# Altium PCB WorkplaceSaferyDevice_PCB.PcbDoc
Units mm, origin at the board's own origin, x right, y up, seen from the top; angles counter-clockwise.
Board outline 40 x 50 mm, 4 copper layers (Top Layer, Int1 (GND), Int2 (GND), Bottom Layer), stack 1.429 mm thick; 52 components, 37 nets, 203 pads, 180 vias.
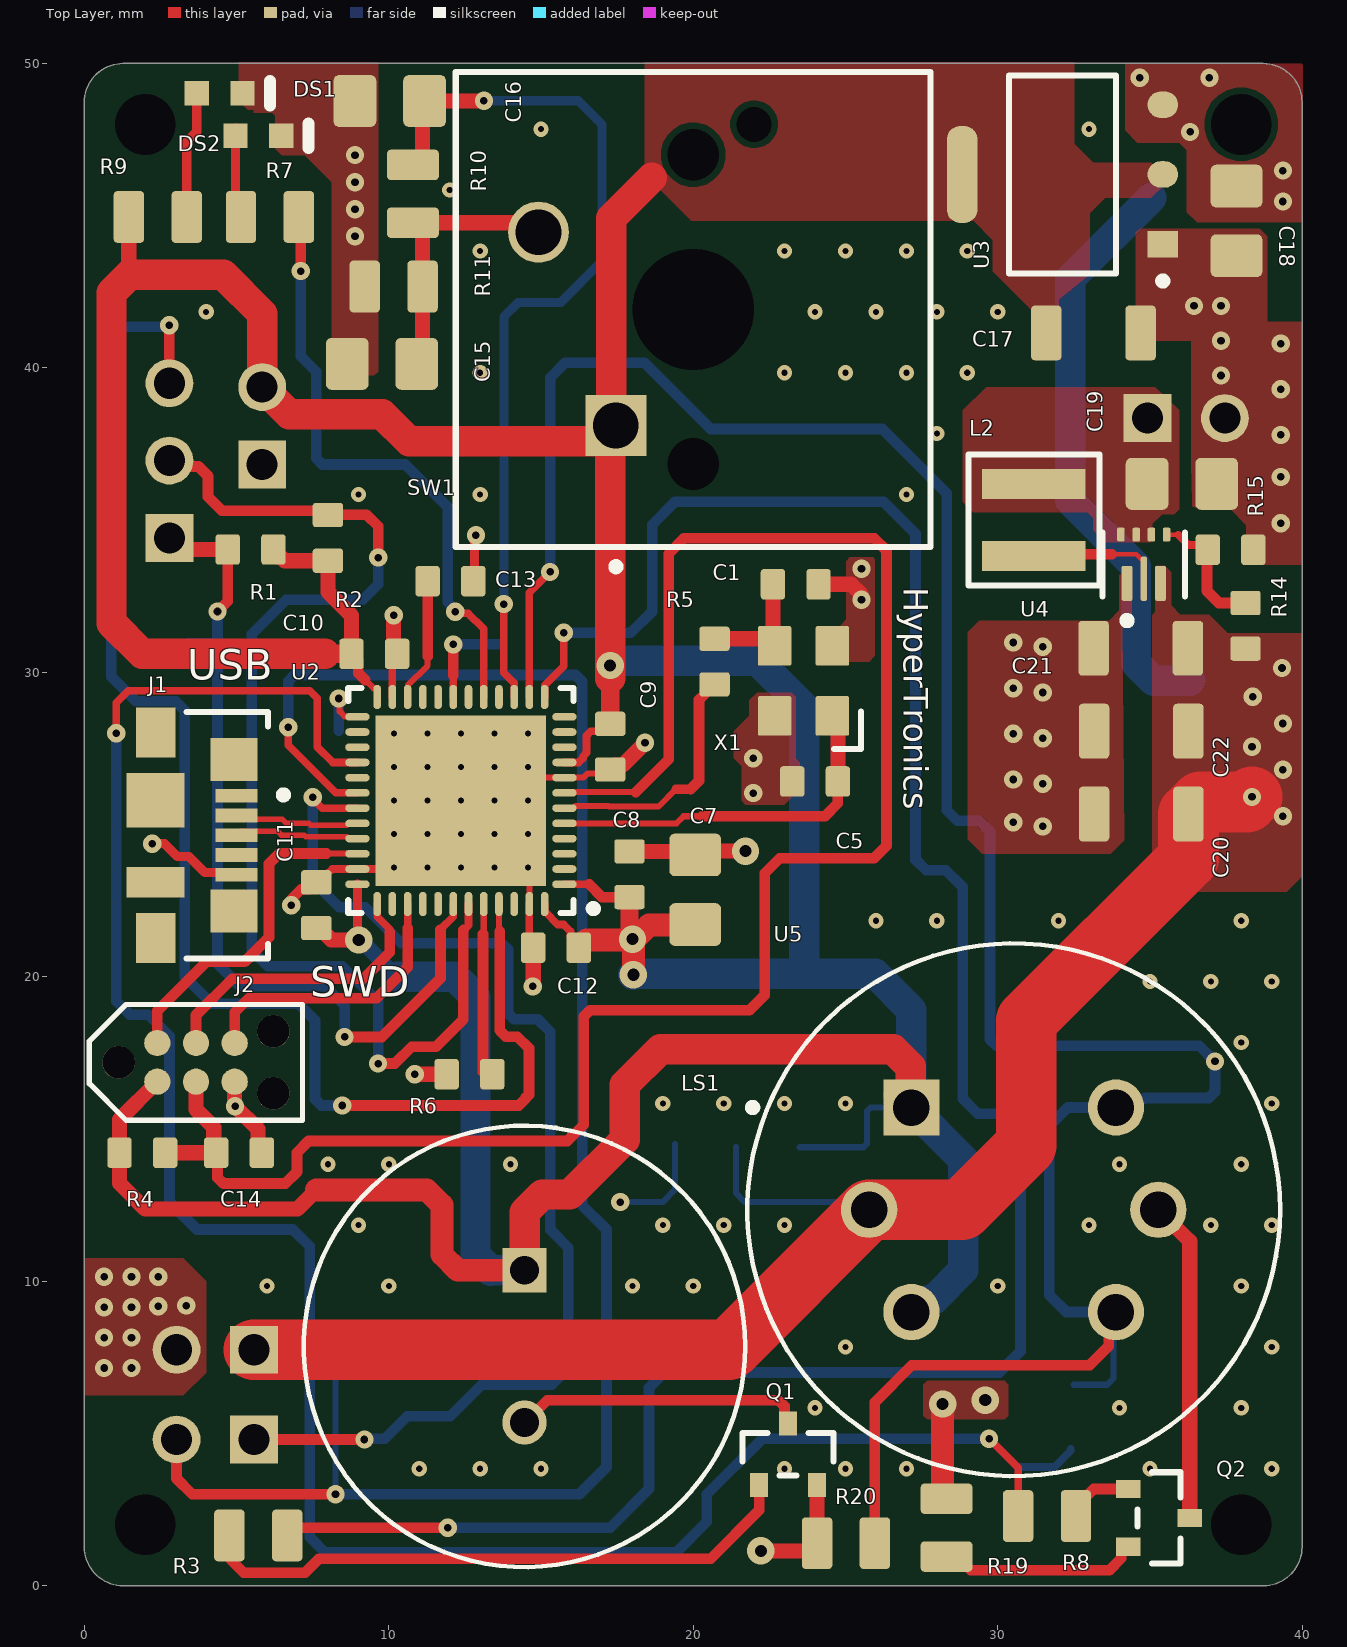
[diagram p0: Top Layer view]
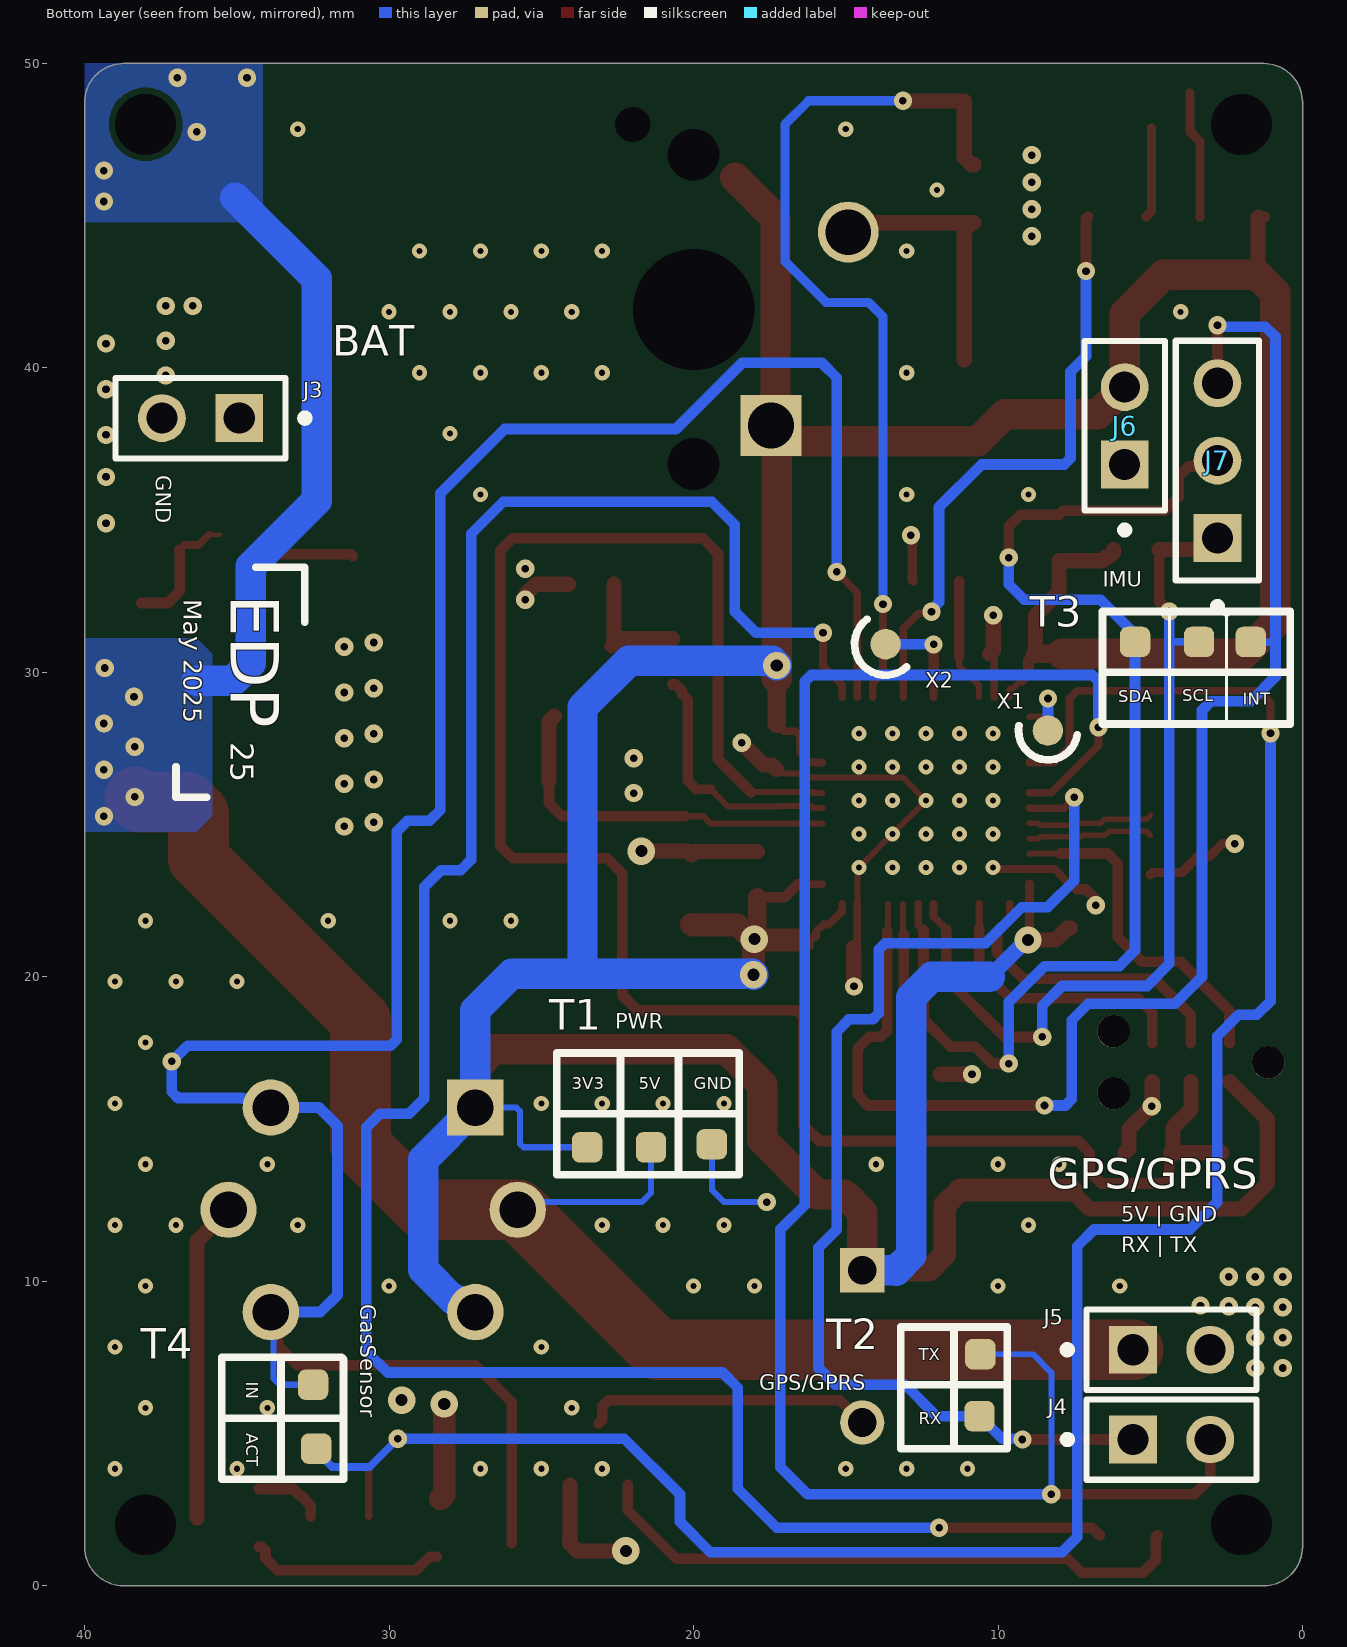
[diagram p1: Bottom Layer view, seen from below]
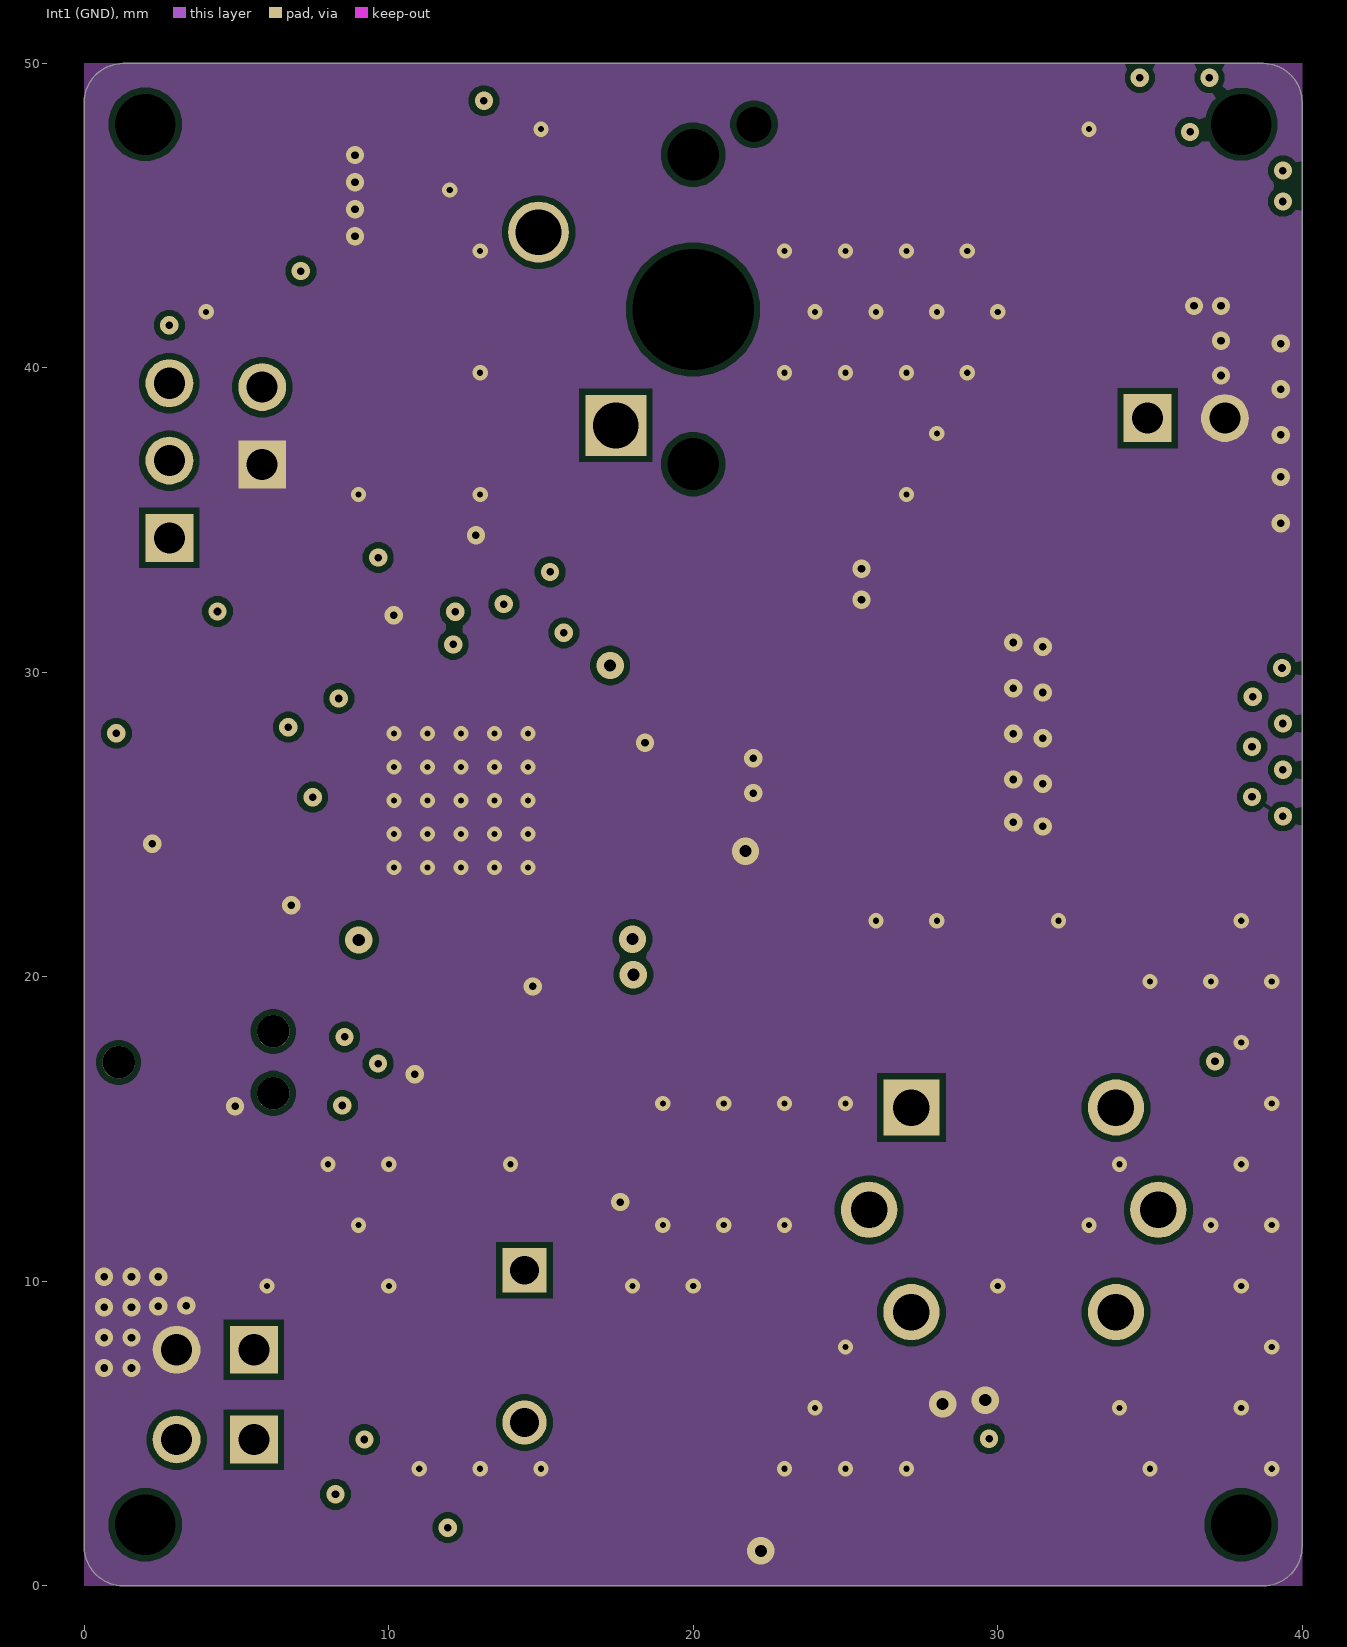
[diagram p2: Int1 (GND)]
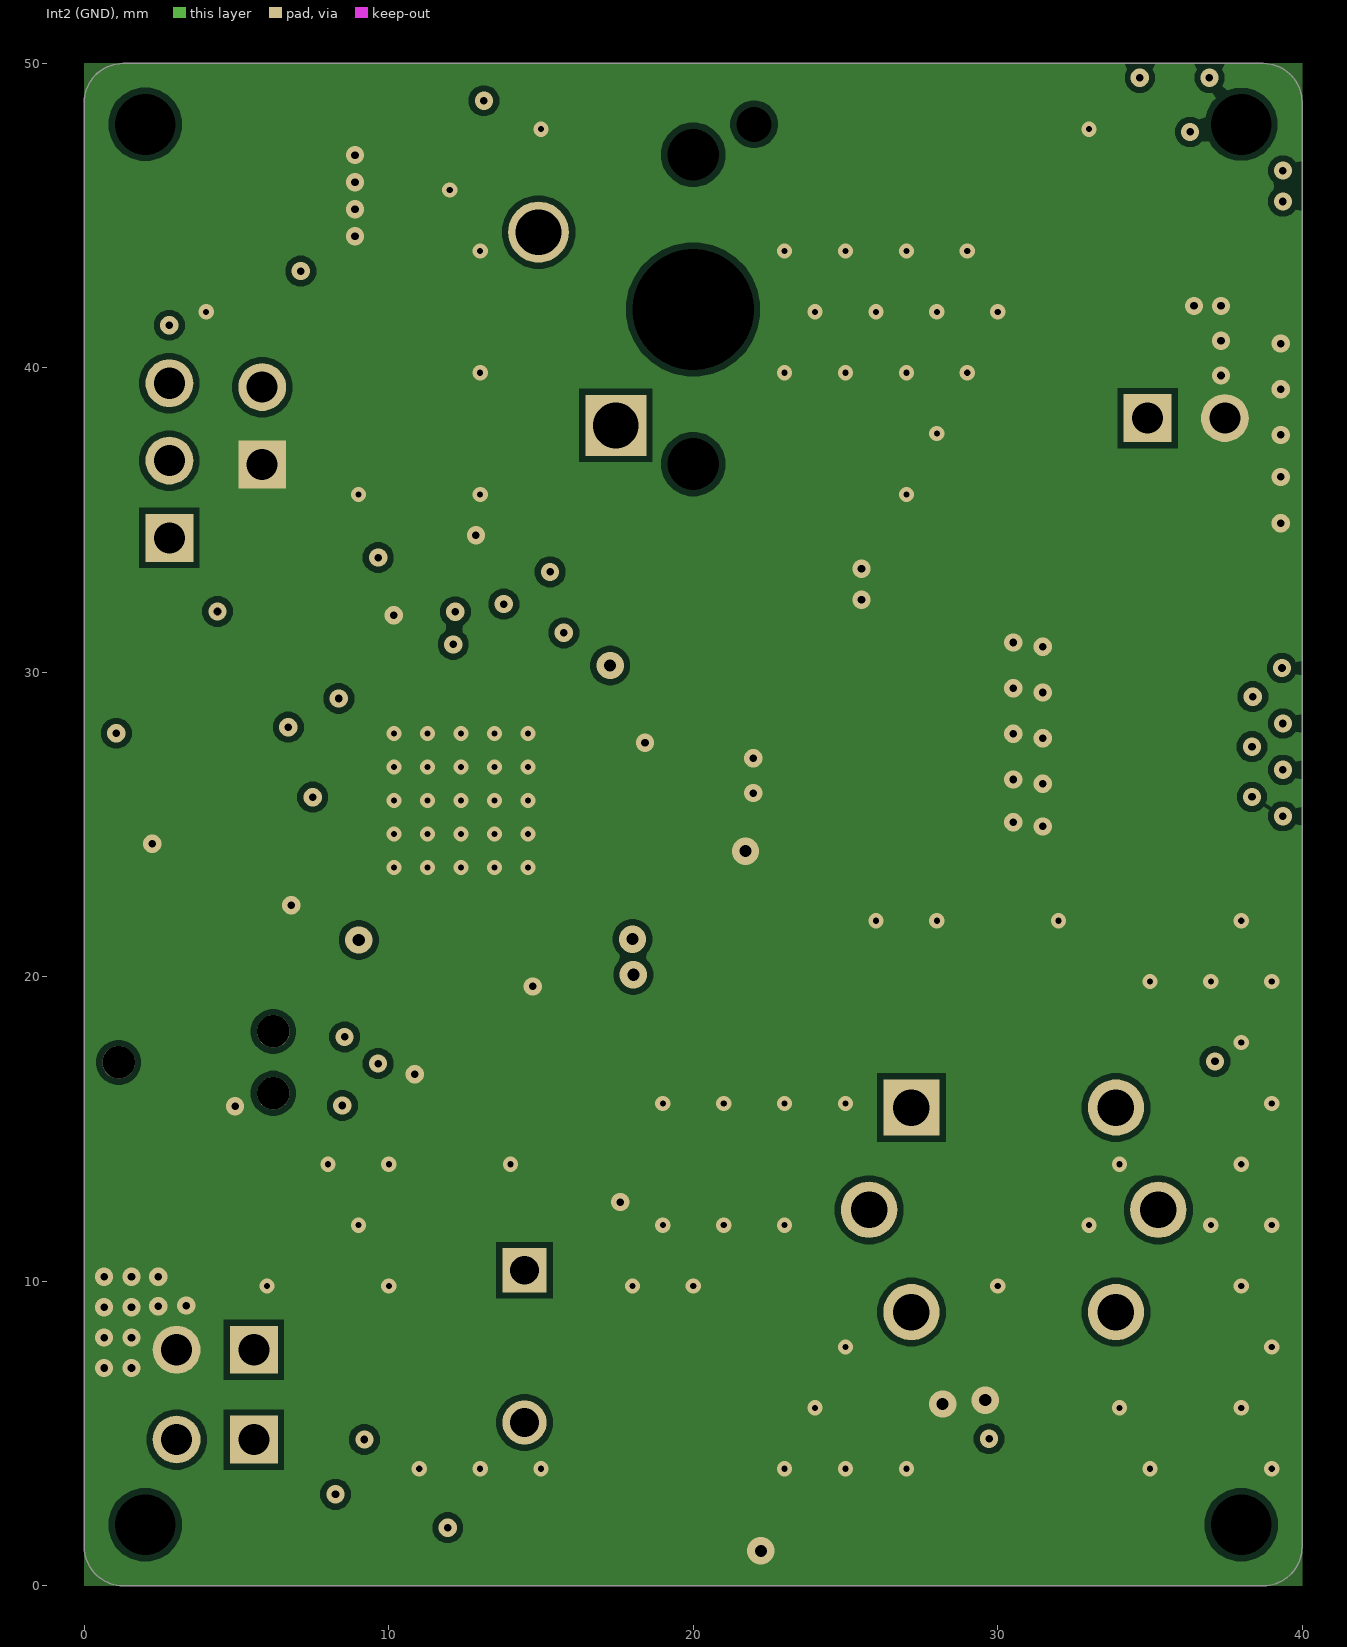
[diagram p3: Int2 (GND)]
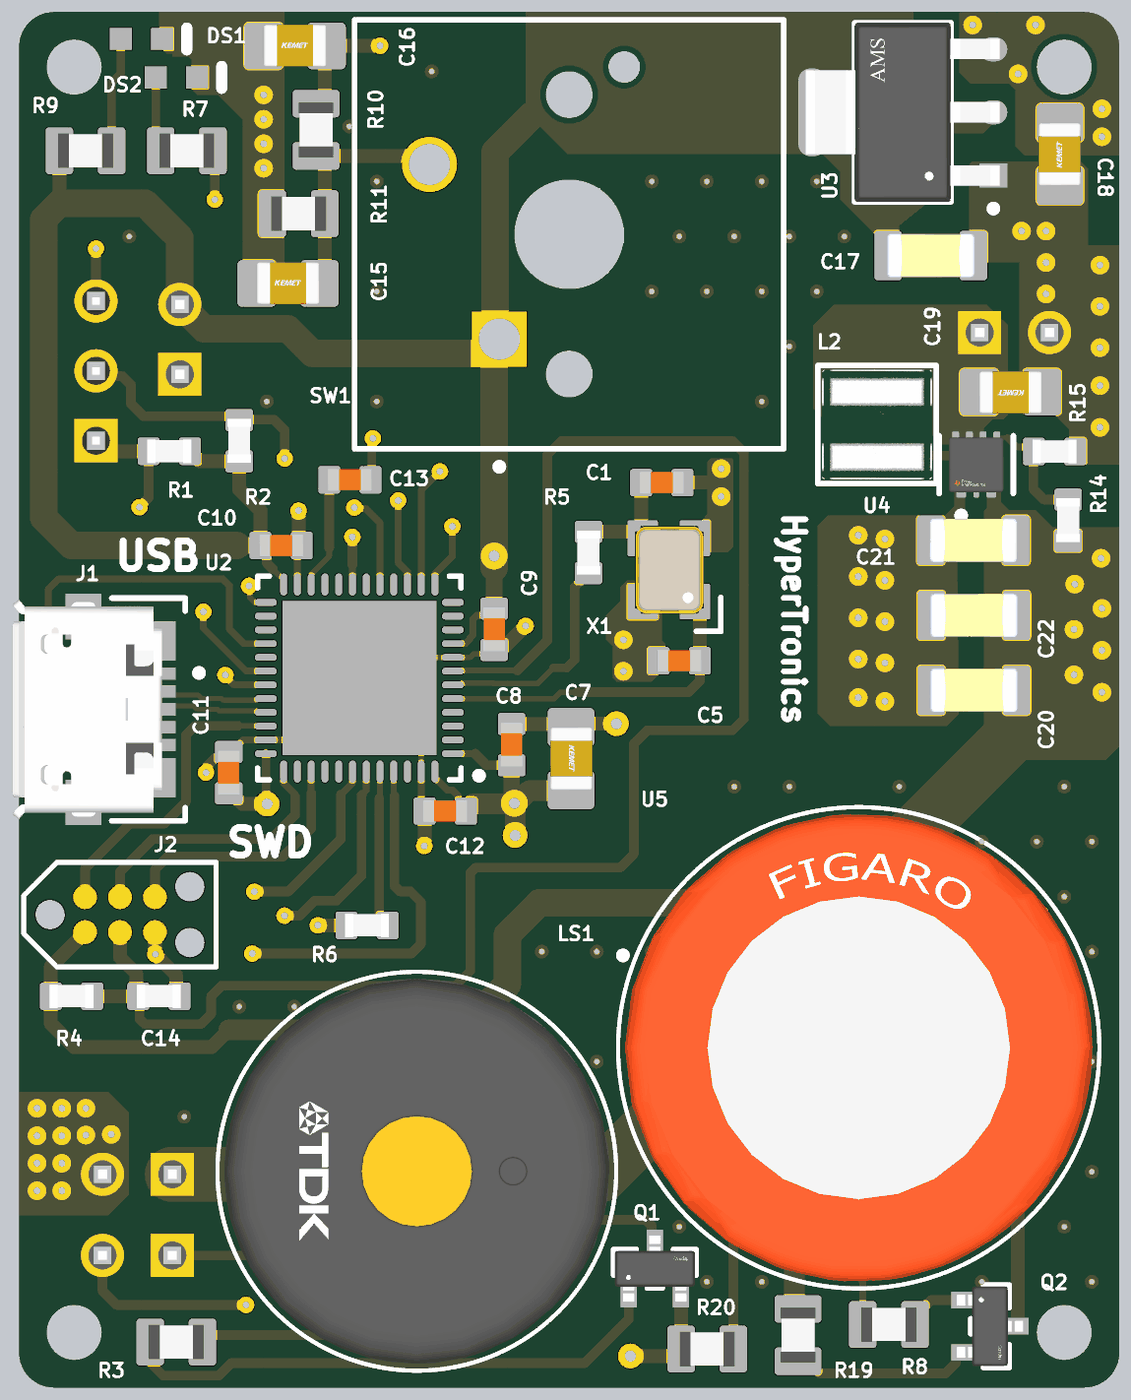
[diagram p4: 3D render of the assembled board from above, using the file's embedded part models]
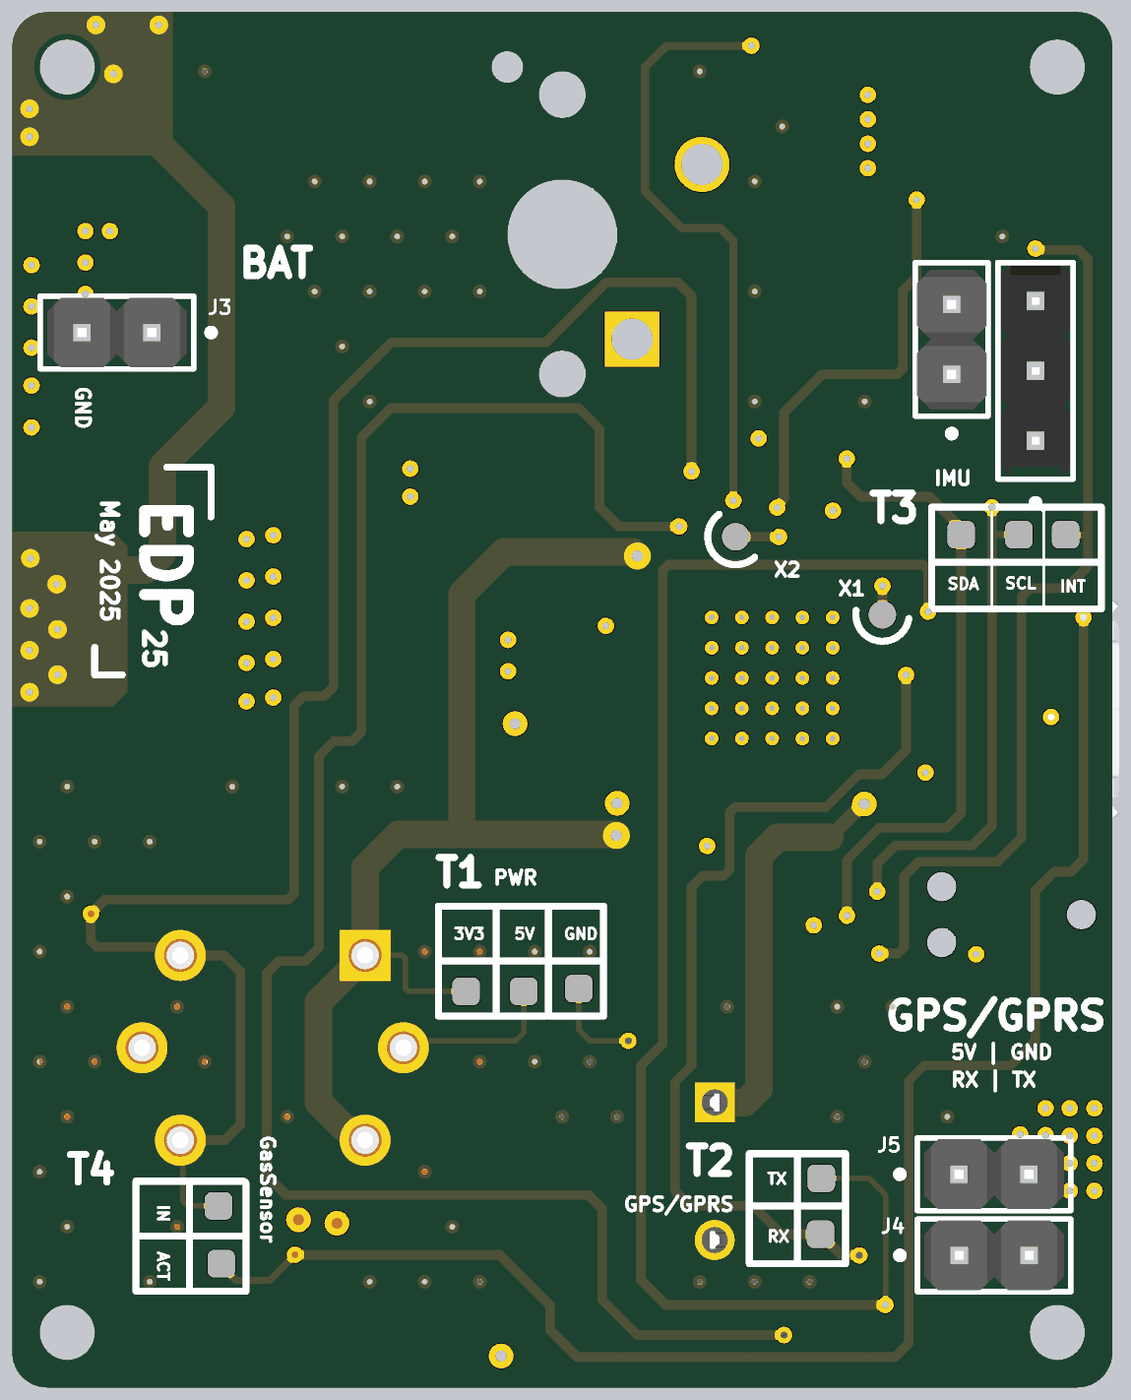
[diagram p5: 3D render of the assembled board from below, using the file's embedded part models]

## Layer stack, top to bottom
Top Solder: solder mask 0.0254, SM-001, Dk 4
Top Layer: signal copper 0.035
Dielectric 1: prepreg 0.1295, PP-017, Dk 4.6
Int1 (GND): signal copper 0.0175
Dielectric 3: core 1.065, Core-039, Dk 4.6
Int2 (GND): signal copper 0.0175
Dielectric 5: prepreg 0.1295, PP-017, Dk 4.6
Bottom Layer: signal copper 0.035
Bottom Solder: solder mask 0.0254, SM-001, Dk 4

## Board outline
0,1.27 0,48.73 cw(c1.27,48.73) 1.27,50 38.73,50 cw(c38.73,48.73) 40,48.73 40,1.27 cw(c38.73,1.27) 38.73,0 1.27,0 cw(c1.27,1.27)

## Design rules (kind name [scope] priority, off if disabled: settings)
Clearance [All] p1: gap=0.2 ignorepadtopadclearanceinfootprint=TRUE
DiffPairsRouting [All] p1: maxlimit=0.254 minlimit=0.203 mostfreqgap=0.254 toplayer_maxgap=0.203 toplayer_prefgap=0.203 toplayer_minwidth=0.181 toplayer_maxwidth=0.181 toplayer_prefwidth=0.181 bottomlayer_maxgap=0.203 bottomlayer_prefgap=0.203 bottomlayer_minwidth=0.181 bottomlayer_maxwidth=0.181 bottomlayer_prefwidth=0.181 impedanceprofiledriven=TRUE impedanceprofileid={1D892A27-E2E8-4F09-B81A-7DF89D45195A} impedanceprofilevalue=90.000000 maxuncoupledlength=12.7
MinimumSolderMaskSliver [All] p1: minsoldermaskwidth=0.1
PolygonConnect [All] p1: connectstyle=Direct reliefconductorwidth=0.254 reliefentries=4 polygonreliefangle="90 Angle" airgapwidth=0.254
RoutingVias [All] p1: holewidth=0.711 width=1.27 viastyle="Through Hole" minholewidth=0.711 minwidth=1.27 maxholewidth=0.711 maxwidth=1.27
SilkToSolderMaskClearance [IsPad] p1: minsilkscreentomaskgap=0.2 clearancetoexposedcopper=TRUE
SolderMaskExpansion [All] p1: expansion=0.038 istentingtop=FALSE useseparateexpansions=TRUE expansionbottom=0.038 istentingbottom=FALSE
SupplyNets "Schematic Supply Nets_2" [InNet('GND')] p1: voltage=0.000
SupplyNets "Schematic Supply Nets_3" [InNet('+3V3')] p2: voltage=0.000
SupplyNets "Schematic Supply Nets_1" [InNet('V BAT')] p3: voltage=0.000
SupplyNets "Schematic Supply Nets" [InNet('+5V')] p4: voltage=0.000
UnRoutedNet [All] p1: checkbadconnections=TRUE
Width [All] p1: maxlimit=2 minlimit=0.1 preferedwidth=0.3 midlayer1_minwidth=0.2 midlayer1_maxwidth=1 midlayer1_prefwidth=0.254 midlayer2_minwidth=0.2 midlayer2_maxwidth=1 midlayer2_prefwidth=0.254 bottomlayer_minwidth=0.2 bottomlayer_maxwidth=1 minimp=50.000000 maximp=50.000000 favimp=50.000000
26 further rules are at their usual default settings.

## Classes and differential pairs
differential pair class DIFF_USB: USB_D
differential pair USB_D: +USB_D_P -USB_D_N

## Components (designator, comment, footprint, x,y, rotation, side; value= is the part's Value field where it differs from the comment)
C1 "10p" CAP_0603 23.368,32.893 r180 top
C5 "10p" CAP_0603 24.003,26.416 r0 top
C7 "2u2" CAP_0805 20.066,22.86 r270 top
C8 "100n" CAP_0603 17.907,23.368 r270 top
C9 "100n" CAP_0603 17.272,27.559 r90 top
C10 "100n" CAP_0603 9.525,30.607 r180 top
C11 "100n" CAP_0603 7.62,22.352 r270 top
C12 "100n" CAP_0603 15.494,20.955 r0 top
C13 "2.2u" CAP_0603 12.026,32.996 r180 top value=2.2uF
C14 "100n" RES_0603 5.08,14.224 r180 top
C15 "10p" CAP_0805 9.779,40.132 r0 top
C16 "100n" CAP_0805 10.033,48.768 r0 top
C17 "22u" CAP_1206 33.147,41.148 r180 top
C18 "47u" CAP_0805 37.846,44.831 r90 top
C19 "10u" CAP_0805 36.05,36.19 r180 top
C20 "22u" CAP_1206 34.716,25.344 r0 top
C21 "22u" CAP_1206 34.7,30.795 r0 top
C22 "22u" CAP_1206 34.716,28.069 r0 top
DS1 "LED" LTST-C191KRKT_V 4.445,49.022 r0 top
DS2 "LED" LTST-C190GKT_V 5.715,47.625 r0 top
J1 "473460001" FP-473460001-MFG 2.69,24.65 r270 top
J2 "TC2030-NL" TC2030-NL-FP 3.667,17.189 r0 top
J3 "M20-9990246" FP-M20-9990246-MFG 36.195,38.35 r0 bottom
J4 "M20-9990246" FP-M20-9990246-MFG 4.3,4.8 r180 bottom
J5 "M20-9990246" FP-M20-9990246-MFG 4.302,7.75 r180 bottom
J6 "M20-9990246" FP-M20-9990246-MFG 5.842,38.1 r90 bottom
J7 "22-28-4030" FP-22-28-4030-MFG 2.794,36.957 r90 bottom
L2 "XAL4020-102MEC" FP-XAL4020-102MEC-MFG 31.193,35.006 r270 top value=1uH
LS1 "BUZZER" FP-PS1440P02BT-MFG 14.46,7.86 r270 top
Q1 "SS8050-G" FP-SS8050-G-MFG 23.114,4.318 r90 top
Q2 "SS8050-G" FP-SS8050-G-MFG 35.3,2.225 r0 top
R1 "2k2" RES_0603 5.461,34.036 r180 top
R2 "2k2" RES_0603 8.001,34.417 r90 top
R3 "1k" RES_0805 5.715,1.651 r0 top
R4 "10k" RES_0603 1.905,14.224 r0 top
R5 "0R" RES_0603 20.701,30.353 r270 top
R6 "10k" RES_0603 12.65,16.8 r180 top
R7 "1k5" RES_0805 6.096,44.958 r180 top
R8 "1k" RES_0805 31.623,2.286 r180 top
R9 "1k5" RES_0805 2.413,44.958 r0 top
R10 "1k" RES_0805 10.795,45.72 r90 top
R11 "100k" RES_0805 10.16,42.672 r0 top
R14 "732k" RES_0603 38.142,31.528 r90 top
R15 "100k" RES_0603 37.65,34.025 r180 top
R19 "0R" RES_0805 28.321,1.905 r270 top
R20 "10k" RES_0805 25.019,1.397 r180 top
SW1 "PUSH BTN" CHRY-MX1A-11NW_V 20,41.92 r90 top
U2 "STM32F411CEU6" STM-UFQFPN48_L 12.37,25.79 r180 top
U3 "AMS1117-3.3" FP-AMS1117-IPC_C 32.131,46.355 r180 top
U4 "TPS61022RWUT" FP-RWU0007A-MFG 34.8,33.55 r90 top
U5 "TGS822" FP-TGS822-MFG 30.528,12.347 r0 top
X1 "24MHz" XTAL_3225 23.622,29.718 r90 top

## Footprints (in the part's own frame and the unit in brackets; to place one, negate y for a bottom-side part, rotate by r counter-clockwise, add the part's x,y. Pads: shape width x height; smd on the part's side, far side on the other; paste and mask are expansions set on the pad)
CAP_0603 [mm]
  rrect25% 0.8x1 smd: 1(-0.75,0) 2(0.75,0)
  body extent -0.8,-0.4 0.8,0.4, height 0.51
CAP_0805 [mm]
  rrect25% 1.4x1.7 smd: 1(-1.143,0) 2(1.143,0)
  body extent -1.15,-0.76 1.15,0.79, height 1.01
CAP_1206 [mm]
  rrect25% 1x1.8 smd: 1(-1.55,0) 2(1.55,0)
  body extent -1.6,-0.8 1.6,0.8, height 0.94
CHRY-MX1A-11NW_V [mm] "THD, 2-Leads, Body 15.6x15.6mm"
  rect 2x2 hole 1.499 paste-2539.97: 1(-3.81,2.54)
  round 2 hole 1.499 paste-2539.97: 2(2.54,5.08)
  round 0 hole 3.988 unplated paste-2539.97: MH1(0,0)
  round 0 hole 1.702 unplated paste-2539.97: MH2(-5.08,0) MH3(5.08,0)
  silkscreen extent -8.57,-7.8 7.8,7.8, body extent -7.8,-7.8 7.8,7.8, height 15.2
FP-22-28-4030-MFG [mm]
  rect 1.57x1.57 hole 1.02 paste-2539.97 mask+0: 1(-2.54,0)
  round 1.57 hole 1.02 paste-2539.97 mask+0: 2(0,0) 3(2.54,0)
  silkscreen extent -4.92,-1.37 3.94,1.37, body extent -3.81,-1.24 3.81,1.24, height 8.39
FP-473460001-MFG [mm]
  rect 0.45x1.38 smd paste+0 mask+0: 1(-1.3,2.31) 2(-0.65,2.31) 3(0,2.31) 4(0.65,2.31) 5(1.3,2.31)
  rect 1.425x1.55 smd paste+0 mask+0: 6(-2.488,2.225) 7(2.488,2.225)
  rect 1.65x1.3 smd paste+0 mask+0: 8(-3.375,-0.35) 11(3.375,-0.35)
  rect 1.8x1.9 smd paste+0 mask+0: 9(-1.15,-0.35)
  rect 1x1.9 smd paste+0 mask+0: 10(1.55,-0.35)
  silkscreen extent -4.05,0.67 4.05,3.98, body extent -4.3,-2.48 4.3,3.45, height 0.25
FP-AMS1117-IPC_C [mm]
  rect 1.004x0.872 smd paste+0 mask+0: 1(-3.295,2.29)
  rrect100% 1.004x0.872 smd paste+0 mask+0: 2(-3.295,0) 3(-3.295,-2.29)
  rrect87% 1.004x3.182 smd paste+0 mask+0: 4(3.295,0)
  silkscreen extent -3.42,-3.25 1.75,3.62, body extent -3.9,-3.35 3.9,3.35, height 0.25
FP-M20-9990246-MFG [mm]
  rect 1.57x1.57 hole 1.02 paste-2539.97 mask+0: 1(-1.27,0)
  round 1.57 hole 1.02 paste-2539.97 mask+0: 2(1.27,0)
  silkscreen extent -3.55,-1.32 2.79,1.32, body extent -2.54,-1.27 2.54,1.27, height 8.99
FP-PS1440P02BT-MFG [mm]
  rect 1.45x1.45 hole 0.95 paste-2539.97 mask+0: 1(-2.5,0)
  round 1.45 hole 0.95 paste-2539.97 mask+0: 2(2.5,0)
  silkscreen extent -7.25,-7.25 7.25,7.25, body extent -7,-6.99 7,7, height 9.53
FP-RWU0007A-MFG [mm]
  rrect29% 1.15x0.35 smd paste-1000 mask+0: 1(-0.625,0.55) 3(-0.625,-0.55)
  rrect50% 1.45x0.2 smd paste-1000 mask+0: 2(-0.475,0)
  rrect40% 0.45x0.25 smd paste+0 mask+0: 4(0.975,-0.75) 5(0.975,-0.25) 6(0.975,0.25) 7(0.975,0.75)
  silkscreen extent -1.97,-1.35 1.05,1.35, body extent -1.3,-1.15 1.3,1.15, height 0.25
FP-SS8050-G-MFG [mm]
  rect 0.8x0.6 smd paste+0 mask+0: 1(-1.01,0.95) 2(-1.01,-0.95) 3(1.01,0)
  silkscreen extent -0.7,-1.5 0.7,1.5, body extent -1.51,-1.6 1.51,1.6, height 0.25
FP-TGS822-MFG [mm]
  rect 1.85x1.85 hole 1.2 paste-2539.97 mask+0: 1(-3.359,3.359)
  round 1.85 hole 1.2 paste-2539.97 mask+0: 2(-4.75,0) 3(-3.359,-3.359) 4(3.359,-3.359) 5(4.75,0) 6(3.359,3.359)
  silkscreen extent -8.75,-8.75 8.75,8.75, body extent -8.5,-8.49 8.5,8.49, height 11
FP-XAL4020-102MEC-MFG [mm]
  rect 0.98x3.4 smd paste+0 mask+0: 1(-1.185,0) 2(1.185,0)
  silkscreen extent -2.15,-2.15 2.15,2.15, body extent -2.25,-2.25 2.25,2.25, height 0.25
LTST-C190GKT_V [mm] "SMD, 2-Leads, Body 1.6x0.8mm"
  rect 0.8x0.8 smd: 1(-0.75,0) 2(0.75,0)
  silkscreen extent 1.65,-0.4 1.65,0.4, body extent -0.8,-0.4 0.8,0.4, height 0.9
LTST-C191KRKT_V [mm] "SMD, 2-Leads, Body 1.6x0.8mm"
  rect 0.8x0.8 smd: 1(-0.75,0) 2(0.75,0)
  silkscreen extent 1.65,-0.4 1.65,0.4, body extent -0.8,-0.4 0.8,0.4, height 0.9
RES_0603 [mm]
  rrect25% 0.8x1 smd: 1(-0.75,0) 2(0.75,0)
  body extent -0.8,-0.43 0.8,0.43, height 0.52
RES_0805 [mm]
  rrect25% 1x1.7 smd: 1(-0.95,0) 2(0.95,0)
  body extent -1,-0.63 1,0.63, height 0.47
STM-UFQFPN48_L [mm] "QFN, 48-Leads, Body 7.1x7.1mm, Pitch 0.5mm, Thermal Pad 5.6x5.6mm, IPC High Density"
  oval 0.8x0.25 smd: 1(-3.4,2.75) 2(-3.4,2.25) 3(-3.4,1.75) 4(-3.4,1.25) 5(-3.4,0.75) 6(-3.4,0.25) 7(-3.4,-0.25) 8(-3.4,-0.75) 9(-3.4,-1.25) 10(-3.4,-1.75) 11(-3.4,-2.25) 12(-3.4,-2.75) 25(3.4,-2.75) 26(3.4,-2.25) 27(3.4,-1.75) 28(3.4,-1.25) 29(3.4,-0.75) 30(3.4,-0.25) 31(3.4,0.25) 32(3.4,0.75) 33(3.4,1.25) 34(3.4,1.75) 35(3.4,2.25) 36(3.4,2.75)
  oval 0.25x0.8 smd: 13(-2.75,-3.4) 14(-2.25,-3.4) 15(-1.75,-3.4) 16(-1.25,-3.4) 17(-0.75,-3.4) 18(-0.25,-3.4) 19(0.25,-3.4) 20(0.75,-3.4) 21(1.25,-3.4) 22(1.75,-3.4) 23(2.25,-3.4) 24(2.75,-3.4) 37(2.75,3.4) 38(2.25,3.4) 39(1.75,3.4) 40(1.25,3.4) 41(0.75,3.4) 42(0.25,3.4) 43(-0.25,3.4) 44(-0.75,3.4) 45(-1.25,3.4) 46(-1.75,3.4) 47(-2.25,3.4) 48(-2.75,3.4)
  rect 5.6x5.6 smd: 49(0,0)
  silkscreen extent -4.48,-3.7 3.7,3.7, body extent -3.55,-3.55 3.55,3.55, height 0.6
TC2030-NL-FP [mil]
  round 33.98 smd paste-16.99: 1(-50,-25) 2(-50,25) 3(0,-25) 4(0,25) 5(50,-25) 6(50,25)
  round 42.01 hole 42.01 unplated: MH(-100,0) MH(100,40) ""(100,-40)
  silkscreen extent -138,-75 138,75
XTAL_3225 [mm]
  rrect10% 1.3x1.1 smd: 1(-1.15,-0.95) 2(1.15,-0.95) 3(1.15,0.95) 4(-1.15,0.95)
  silkscreen extent -2.23,-1.89 -1,-1, body extent -1.6,-1.28 1.6,1.22, height 0.61

## Part data
C1 C5 C8 C9 C10 C11 C12: library part CAP_0603, "Capacitor SMD 0603"
C7 C15 C16: library part CAP_0805, "Capacitor SMD 0805"
C13: library part CAP_0603, "Ceramic Capacitor, Multilayer, Ceramic, 16V, 10% +Tol, 10% -Tol, X5R, 15% TC, 2.2uF, Surface Mount, 0603", Capacitor Type=Ceramic, Case/Package=0603, Max Operating Temperature=85°C, Min Operating Temperature=-55°C, Package Shape=Rectangular, Package Style=SMTMeter, Rated DC Voltage (URdc)=16V, Supplier Part Number=C0603C225K4PACTU, Temperature Characteristics Code=X5R, Tolerance  (fill in as +-)=10%, Category="Ceramic Capacitors", ComponentLink1Description=https://datasheet.ciiva.com:443/pdfs/VipMasterIC/IC/KEME/KEME-S-A0008991665/KEME-S-A0008991665-1.pdf?src-supplier=IHS+Markit, ComponentLink1URL=https://datasheet.ciiva.com:443/pdfs/VipMasterIC/IC/KEME/KEME-S-A0008991665/KEME-S-A0008991665-1.pdf?src-supplier=IHS+Markit, Dielectric Material=Ceramic, Height=0.8mm, JESD-609 Code=e3, Length=1.6mm, Mounting Technology="Surface Mount", Multilayer=Yes, Packaging="Tape and Reel", Pins=2, Pricing="4000=0.021, 8000=0.02 (USD)", Reach SVHC Compliant=Yes, RoHS=Yes, RoHS Compliant=Yes, Stock=244000, Supplier="Arrow Electronics", Terminal Finish=Nickel, Termination=Wraparound, Tolerance (fill in as +-)=10%, Width=0.8mm
C14 R1 R2 R4 R5 R6: library part RES_0603, "Resistor SMD 0603"
C17 C20 C21 C22: library part CAP_1206, "Capacitor SMD 1206"
C18 C19: library part CAP_0805, "Capacitor SMD 0805 / suggested: / GRM21BR61E106MA73L"
DS1: library part CMP-007-00024-2, "LED Uni-Color Red, 62.5 mW, 25 mA, -30 to 85 degC, 2-Pin SMD, RoHS, Tape and Reel", Case/Package=0603, Colour=Red, Forward Current=20mA, Forward Voltage=2V, Manufacturer=Lite-On, Max Operating Temperature=85°C, Min Operating Temperature=-55°C, Package Description="2-Pin Surface Mount Device, Body 1.6 x 0.8 mm", Package Quantity=3000, Package Reference=C191KRKT, Power=75mW, Datasheet URL=http://optoelectronics.liteon.com/upload/download/DS-22-99-0151/S_110_LTST-C190KRKT.pdf, Datasheet Version="Rev. F, 05/2013", Illumination Colour=Red, Lens Style=Diffused, Luminous Intensity=54mcd, Manufacturer URL=http://www.us.liteon.com/, Mounting Technology=SM, Nominal Vf=2V, Packaging=TapeandReel, Pins=2, RoHS Compliant=True, Viewing Angle=130degrees
DS2: library part CMP-007-00022-2, "LED Uni-Color Green, 100 mW, 30 mA, -55 to 85 degC, 2-Pin SMD, RoHS, Tape and Reel", Case/Package=0603, Colour=Green, Forward Current=20mA, Forward Voltage=2.1V, Manufacturer=Lite-On, Max Operating Temperature=85°C, Min Operating Temperature=-55°C, Package Description="2-Pin Surface Mount Device, Body 1.6 x 0.8 mm", Package Quantity=3000, Package Reference=C190GKT, Power=100mW, Datasheet URL=http://datasheet.octopart.com/LTST-C190GKT-Lite-On-datasheet-158530.pdf, Datasheet Version=Dec-06, Illumination Colour=Green, Lens Style=Clear, Luminous Intensity=6mcd, Manufacturer URL=http://www.us.liteon.com/, Mounting Technology=SM, Nominal Vf=2.1V, Packaging=TapeandReel, Pins=2, RoHS Compliant=True, Viewing Angle=130degrees
J1: library part CMP-2000-05246-2, "CONN RCPT USB2.0 MICRO B SMD R/A", Current Rating=1.8A, Manufacturer=Molex, Package=0, Temperature="-30°C to +85°C", Temperature Range High=+85°C, Temperature Range Low=-30°C, Voltage Rating=30V, Automotive=No, Category=Conn, ComponentLink2Description=Datasheet, ComponentLink2URL=https://www.molex.com/webdocs/datasheets/pdf/en-us/0473460001_IO_CONNECTORS.pdf, Conn Orientation="Right Angle", Contact Material=Gold,Nickel, Device Class L1=Connectors, Device Class L2="USB Connectors", Device Class L3=unset, Digikey Description="CONN RCPT USB2.0 MICRO B SMD R/A", Footprint Url=https://www.molex.com/pdm_docs/sd/473460001_sd.pdf, Height=2.945mm, Is Female=yes, Lead Free=Yes, Manufacturer Part Number=473460001, Number Of Contacts=5, Octopart=https://octopart.com/47346-0001-molex-7164928, Pitch=0.65mm, RoHS=TRUE, Shielding=true, Usb Standard="USB 2.0"
J2: "Tag-Connect No-Solder SWD Debug Connector (No Legs) DO NOT PLACE", Manufacturer=Tag-Connect, Manufacturer Part Number=TC2030-NL-FP
J3 J4 J5 J6: library part CMP-15831-000009-1, "CONN HEADER VERT 2POS 2.54MM", Current Rating=3A, Manufacturer=Harwin, Temperature="-40°C to +105°C", Temperature Range High=+105°C, Temperature Range Low=-40°C, Automotive=No, Category=Conn, ComponentLink2Description=Datasheet, ComponentLink2URL=https://cdn.harwin.com/pdfs/M20-999.pdf, Conn Gender=Male, Conn Orientation=Vertical, Contact Material=Tin,Nickel, Device Class L1=Connectors, Device Class L2="Headers and Wire Housings", Device Class L3=unset, Digikey Description="CONN HEADER VERT 2POS 2.54MM", Height=8.99mm, Lead Free=Yes, Manufacturer Part Number=M20-9990246, Mouser Description="2.54mm (0.1\") Pitch SIL Vertical PC Tail Pin Header, 6.1mm mating pin height, tin, 2 contacts", Number Of Contacts=2, Number of Rows=1, Octopart=https://octopart.com/m20-9990246-harwin-2590635, Package=M20-9990246, Pitch=2.54mm, RoHS=TRUE
J7: library part CMP-04776-000098-1, "CONN HEADER VERT 3POS 2.54MM", Current Rating=4A, Manufacturer=Molex, Temperature="-40°C to +80°C", Temperature Range High=+80°C, Temperature Range Low=-40°C, Voltage Rating=500V, Automotive=No, Category=Conn, ComponentLink2Description=Datasheet, ComponentLink2URL=https://www.molex.com/webdocs/datasheets/pdf/en-us/0022284030_PCB_HEADERS.pdf, Conn Gender=Male, Conn Orientation=Vertical, Contact Material=Gold,Nickel, Device Class L1=Connectors, Device Class L2="Headers and Wire Housings", Device Class L3=unset, Digikey Description="CONN HEADER VERT 3POS 2.54MM", Footprint Url=https://www.molex.com/pdm_docs/sd/022284030_sd.pdf, Height=8.88mm, Lead Free=Yes, Manufacturer Part Number=22-28-4030, Mouser Description="Headers & Wire Housings 3P VERT HEADER Sn", Number Of Contacts=3, Number of Rows=1, Octopart=https://octopart.com/0022284030-molex-10476094, Package=22-28-4030, Pitch=2.54mm, RoHS=TRUE
L2: library part CMP-11268-000037-1, "Fixed Inductors 1uH 20% 9.6A 14.60mOhms AEC-Q200", Ambient Temperature Range High=+125°C, Ambient Temperature Range Low=-40°C, Inductance=1uH, Manufacturer=Coilcraft, Package=0, Rms Current=9.6A, Saturation Current=8.7A, Self Resonant Frequency=79MHz, Series Resistance=14.6mΩ, Test Frequency=1MHz, Tolerance=20%, Automotive=Yes, Automotive Grade="Grade 1", Category=Ind, ComponentLink2Description=Datasheet, ComponentLink2URL=https://www.coilcraft.com/pdfs/xal4000.pdf, Composition=Wirewound, Core Material=Composite, Device Class L1="Passive Components", Device Class L2=Inductors, Device Class L3="Fixed Inductors", Height=2.1mm, Lead Free=Yes, Manufacturer Part Number=XAL4020-102MEC, Mouser Description="Power inductor, shielded, 20% tol, SMT, RoHS, halogen f", Octopart=https://octopart.com/xal4020-102mec-coilcraft-13142161, RoHS=TRUE, Shielding=true, Standoff Height=0.1mm
LS1: library part CMP-08413-000003-1, "AUDIO PIEZO TRANSDUCER 30V TH", Frequency=4kHz, Max Operating Temperature=70°C, Min Operating Temperature=-10°C, Operating Supply Voltage=3V, Package Quantity=350, Diameter=14mm, Height=8mm, Lead Free="Lead Free", Mount="Through Hole", Number of Terminals/Pins=2, Packaging="Tape and Reel", RoHS Compliant=Yes, Self Resonant Frequency=4kHz, Termination="PC Pins", Voltage Rating (DC)=3V, Washable=No
Q1 Q2: library part CMP-20235-000001-1, "NPN TRANSISTOR 1.5A 40V SOT-23 R", Case/Package=TO-236-3, Collector Emitter Breakdown Voltage=25V, Collector Emitter Voltage (VCEO)=400mV, Max Collector Current=1.5A, Max Power Dissipation=300mW, Transition Frequency=100MHz, Max Breakdown Voltage=25V, Mount="Surface Mount", Packaging="Tape and Reel", RoHS Compliant=Yes
R3 R7 R8 R9 R10 R11 R19 R20: library part RES_0805, "Resistor SMD 0805"
R14 R15: library part RES_0603, "Resistor SMD 0603 / 100mW 1%"
SW1: library part CMP-2000-06786-1, "Keylock Switch, 12 V, -10 to 70 degC, 2-Pin THD, RoHS, Bulk", Actuator Color=N/A, Illumination Color=N/R, Manufacturer=Cherry, Maximum AC Voltage Rating=12V, Maximum Contact Resistance=200mOhm, Maximum Current Rating=0.01A, Minimum Insulation Resistance=100MOhm, Operating Force=0.58N, Operating Temperature=-10to70C, Package Description="2-Pin Through Hole Device, Body 15.6 x 15.6 mm", Package Reference=MX1A-11NW, Part No=MX1A11NW, Actuator Length=3.6mm, Actuator Material=N/A, Actuator Style=Button, Body Orientation=Straight, Contact Material=Silver/Gold, Contact Plating=N/A, COO=UK, Datasheet URL=https://cdn.sparkfun.com/datasheets/Components/Switches/MX%20Series.pdf, Datasheet Version=09/2000, Dielectric Strength=N/A, Dimension=15.6x15.6x15.2mm, ECCN=EAR99, Electrical Life=50000000Cycle, Family=MX, Housing Material=N/A, HTS=8536509065, Illumination Type=N/R, IP Rating=N/A, Manufacturer URL=http://cherryswitches.com/cn/, Maximum DC Voltage Rating=12V, Maximum Power Rating=N/A, Mechanical Life=N/A, Mounting=ThroughHole, Mounting Technology=ThroughHole, Number of Terminals=2, Operating Speed=N/A, Packaging=N/A, Pole Throw Configuration=SPST, RoHS=Unknown, Row Spacing=6.35mm, Supplier=CherryElectrical, Switch Configuration=N.O., Terminal Pitch=2.54mm, Terminal Type=PCPins, Total Travel=4.06mm, Type=DesktopProfile
U2: library part CMP-0243-00165-1, "ARM Cortex-M4 32-bit MCU+FPU, 512 KB Flash, 128 KB RAM, 36 I/Os, 48-Pin UFQFPN, -40 to 85 degC, Tray", I/Os (High Current)=36, Operating Frequency(F) (Processor speed) (MHz)=100, Package Description=UFQFPN48, Package Reference="48-Pin Ultra Thin Fine Pitch Quad Flat No-Lead, 7 x 7 x 0.6 mm Body, 0.5 mm Pitch, Exposed Pad", Supply Voltage(Vcc) min (V)=1.7, ComponentLink1Description="Manufacturer URL", ComponentLink1URL=http://www.st.com/, ComponentLink2Description=Datasheet, ComponentLink2URL=http://www.st.com/st-web-ui/static/active/en/resource/technical/document/datasheet/DM00115249.pdf, Core="ARM Cortex-M4", DatasheetVersion="Rev. 6", FLASH Size (Prog) (kB)=512, Internal RAM Size (kB)=128, Mounting Technology="Surface Mount", Packing=Tray
U3: library part CMP-209535-000001-1, "LDO Voltage Regulators 1A, 3.3V", Dropout Voltage=1.1V, Manufacturer="Advanced Monolithic Systems", Max Junction Temp=+125°C, Max Power Dissipation=1.2W, Max Supply Voltage=15V, Nominal Supply Current=5mA, Output Current=1A, Output Voltage=3.3V, Package=AMS1117, Temperature="-40°C to +125°C", Temperature Range Low=-40°C, Automotive=No, Category=IC, ComponentLink2Description=Datasheet, ComponentLink2URL=http://www.advanced-monolithic.com/pdf/ds1117.pdf, Device Class L1="Integrated Circuits (ICs)", Device Class L2="Power Management ICs", Device Class L3="Voltage Regulators - Linear", Height=1.8mm, Ipc Land Pattern Name=SOT229P700X180-4, Lead Free=Yes, Manufacturer Part Number=AMS1117-3.3, Number Of Outputs=1, Octopart=https://octopart.com/ams1117-3.3-advanced+monolithic+systems-25899300, Output Type=Fixed, RoHS=TRUE, Standoff Height=0.64mm, Temperature Range High=+125°C
U4: library part CMP-04918-000300-1, "POWER MANAGEMENT"
U5: library part CMP-04312-24208239-1, "TGS822 MOS-Type organic solvent vapors sensor; range: 50-5000ppm C2H5OH; supply: 5V; power: 660mW", Case/Package=Radial, Max Supply Voltage=24V, Height=10mm, NexarPartId=24208239, RoHS=Compliant
X1: library part TSX-3225_24.0000MF15X-AC, "Crystal SMD 24MHz 10PPM 7pF 3225", Manufacturer=Epson, Manufacturer Part Number="TSX-3225 24.0000MF15X-AC"

## Free pads (board coordinates)
  round 0 hole 2 unplated: MH(2,2) MH(2,48) MH(38,2) MH(38,48)
  rrect50% 1x1 smd far side: "T GND16"(5.5,31) ""(1.7,31) ""(3.4,31) ""(10.583,7.604) ""(10.61,5.57) ""(19.4,14.5) ""(21.4,14.4) ""(23.5,14.4) ""(32.4,4.5) ""(32.5,6.6)
  round 0 hole 1.152 unplated: TH(22,48)
  round 1 smd far side: X1(8.363,28.089) X2(13.696,30.926)

## Via types
v1: diameter 0.5, hole 0.2, Top Layer to Bottom Layer, 91 vias
v2: diameter 0.6, hole 0.25, Top Layer to Bottom Layer, 81 vias
v3: diameter 0.9, hole 0.4, Top Layer to Bottom Layer, 8 vias

## Nets (pads, with @x,y where several pads share a name; then routed paths per layer and width w, separated by ;. In a path a pad name is that pad's centre, name@x,y a point inside that pad or via, vN(x,y) a via of type N, cw(c..) or ccw(c..) an arc to the next point about the centre after c; other vN are vias at no path point)
+3V3: C7.2 C8.2 C9.2 C10.2 C11.2 C12.2 C17.2 J2.1 J6.2 LS1.1 pad.@23.5,14.4 R1.1 R2.1 R4.1 R9.1 SW1.1 U2.1 U2.9 U2.24 U2.36 U2.48 U3.2 U3.4 U5.1 U5.3 | length 180.7
  Top Layer w0.2: 9.229,29.75 9.505,29.475 9.597,29.475 9.62,29.451 U2.24
  Top Layer w0.25: U2.48 15.12,22.115 15.159,22.115 15.557,21.717 15.748,21.717 15.969,21.496 15.969,21.33 16.007,21.292 16.173,21.292 16.173,21.026 C12.2 ; U2.1 16.584,23.04 ; U2.9 16.237,27.04 16.383,27.186 16.383,27.242 16.495,27.354 16.495,27.921 16.641,28.068 17.031,28.068 C9.2
  Top Layer w0.3: U2.36 8.97,21.256 v3(9.017,21.209)
  Top Layer w0.35: R9.1@1.238,44.958 R9.1 ; 4.275,43.35 4.572,43.053 ; C10.2 9,30.382 9,29.979 9.229,29.75 ; 16.584,23.04 17.006,22.618 C8.2
  Top Layer w0.5: R9.1 1.463,43.069 1.479,43.053 ; J2.1 1.155,15.312 R4.1 1.155,13.22 2,12.375 7,12.375 7.625,13 ; R1.1 6.211,33.936 6.361,33.786 6.461,33.786 6.58,33.667 R2.1 8,33.666 8,32.643 8.775,31.868 C10.2 ; C11.2 7.72,21.602 8.113,21.209 v3(9.017,21.209)
  Top Layer w0.6: 7.905,30.607 C10.2 ; C9.2 v3@17.272,29.804 ; C8.2 17.907,21.417 17.948,21.376 17.948,21.295 v3(18.005,21.238)
  Top Layer w0.75: 7.625,13 11.25,13 11.75,12.5 11.75,10.875 12.265,10.36 LS1.1 ; C12.2@16.498,21.209 17.871,21.209 17.977,21.209 v3(18.005,21.238) 18.034,21.209 v3(18.034,20.066) ; v3@18.034,21.226 18.121,21.313 18.165,21.313 18.548,21.696 20.045,21.696 C7.2
  Top Layer w1: 7.905,30.607 1.905,30.607 0.893,31.619 0.893,42.467 1.479,43.053 4.572,43.053 5.842,41.783 J6.2 6.731,38.481 9.779,38.481 10.668,37.592 16.942,37.592 SW1.1@17.07,37.72 ; LS1.1 14.46,12.264 15.046,12.85 15.95,12.85 17.75,14.65 17.75,16.45 18.925,17.625 26.564,17.625 27.15,17.039 U5.1@27.15,15.725 ; v3@17.272,29.804 v3(17.272,30.226) SW1.1@17.272,38.062 ; SW1.1 17.31,38.26 17.31,40.8 17.306,40.804 17.306,43.036 17.31,43.04 17.31,44.92 18.638,46.248 ; U5.1@26.744,16.131 U5.1@27.15,15.725 ; U5.1 U5.1@27.15,15.725
  Bottom Layer w0.2: pad.@23.5,14.4 25.589,14.4 25.706,14.517 25.706,15.589 25.823,15.706 U5.1
  Bottom Layer w0.5: v3(9.017,21.209) 9.066,21.209 10.275,20
  Bottom Layer w1: 10.275,20 12.175,20 12.85,19.325 12.85,10.85 13.35,10.35 13.36,10.36 LS1.1 ; v3(17.272,30.226) 17.421,30.375 22.125,30.375 23.65,28.85 23.65,20.125 23.625,20.1 ; v3(18.034,20.066) 18.068,20.1 23.625,20.1 ; U5.3 27.399,8.988 27.824,9.413 27.913,9.413 28.875,10.375 28.875,14 U5.1 27.169,18.906 25.975,20.1 23.625,20.1
+5V: C18.2 C20.2 C21.2 C22.2 J5.1 pad.@21.4,14.4 R14.1 U3.3 U4.3 U5.2 | length 69
  Top Layer w2: J5.1 21.181,7.75 U5.2 28.827,12.347 30.94,14.46 30.94,18.56 36.266,23.886 C20.2 36.666,25.744 38.19,25.744 v2(38.354,25.908)
  Bottom Layer w0.2: pad.@21.4,14.4 21.4,12.9 21.7,12.6 25.525,12.6 U5.2
  Bottom Layer w1: 35.052,45.593 32.385,42.926 32.385,35.639 34.544,33.48 34.544,30.304 35.13,29.718 36.322,29.718
  other v2: 39.37,25.273 39.37,26.797 38.354,27.559 39.37,28.321 38.382,29.202 39.341,30.142 39.37,45.466 39.37,46.482 36.322,47.752 34.671,49.53 36.957,49.53
"BUZZ IN": R3.2 U2.13 | length 75.6
  Top Layer w0.25: U2.13 15.12,29.576 15.75,30.206 v2(15.75,31.3)
  Top Layer w0.35: R3.2 6.919,1.905 v2(11.938,1.905)
  Bottom Layer w0.35: v2(11.938,1.905) 17.272,1.905 18.55,3.183 18.55,6.5 19.05,7 30.05,7 30.75,7.7 30.75,15.05 30.3,15.5 29.35,15.5 28.85,16 28.85,22.95 28.3,23.5 27.65,23.5 27.3,23.85 27.3,34.55 26.25,35.6 19.4,35.6 18.65,34.85 18.65,32 17.95,31.3 v2(15.75,31.3)
"BUZZ TB": Q1.1 R3.1 | length 20
  Top Layer w0.35: R3.1 4.826,1.59 4.826,0.84 5.24,0.426 7.247,0.426 7.71,0.889 20.574,0.889 22.164,2.479 Q1.1
"BUZZ TC": LS1.2 Q1.3 | length 9.5
  Top Layer w0.35: LS1.2 14.466,5.36 15.202,6.096 22.795,6.096 23,5.891 23,5.442 Q1.3
"DEBOUNCER IN": C15.2 R10.1 R11.2 SW1.2 | length 8.9
  Top Layer w0.5: R10.1 14.204,44.77 14.514,44.46 SW1.2 ; R10.1@10.86,44.77 11.11,44.52 R11.2 C15.2@11.11,40.259
"FB 5V": R14.2 R15.2 U4.4 | length 4.4
  Top Layer w0.15: U4.4 35.928,34.525
  Top Layer w0.25: 35.928,34.525 36.271,34.182 36.743,34.182 R15.2
  Top Layer w0.35: R15.2 36.875,34 36.875,32.671 37.268,32.278 R14.2
"GAS ACT B": Q2.1 R8.1 | length 2.3
  Top Layer w0.35: R8.1 32.573,2.636 32.898,2.961 32.942,2.961 33.156,3.175 Q2.1
"GAS ACT E": Q2.2 R19.2 | length 6.5
  Top Layer w0.35: R19.2@28.448,0.955 28.671,0.955 29.118,0.508 33.673,0.508 34.065,0.9 34.065,1.15 34.19,1.275 Q2.2
"GAS HEATER ACT": pad.@32.4,4.5 R8.2 U2.28 | length 73.1
  Top Layer w0.25: v2(1.05,28) 1.05,29 1.45,29.4 7.4,29.4 7.652,29.148 7.652,27.548 8.16,27.04 U2.28 ; v2(29.718,4.826) 30.673,3.871 R8.2
  Bottom Layer w0.25: v2(29.718,4.826) 30.644,3.9 31.879,3.9 32.025,4.046 32.025,4.057 32.4,4.432 pad.@32.4,4.5
  Bottom Layer w0.35: v2(1.05,28) 1.05,19.2 1.5,18.75 2.1,18.75 2.8,18.05 2.8,12.6 3.7,11.7 6.85,11.7 7.4,11.15 7.4,1.6 7.9,1.1 19.45,1.1 20.45,2.1 20.45,3 22.276,4.826 v2(29.718,4.826)
"GAS SENSOR HEATER": Q2.3 U5.5 | length 10.5
  Top Layer w0.5: U5.5 36.31,11.315 Q2.3
"GAS SENSOR IN": pad.@32.5,6.6 R20.1 U2.14 U5.4 U5.6 | length 85.2
  Top Layer w0.25: U2.14 14.62,32.62 v2@15.298,33.298
  Top Layer w0.35: R20.1 25.969,6.03 27.178,7.239 33.02,7.239 33.653,7.872 33.653,8.754 U5.4
  Bottom Layer w0.2: pad.@32.5,6.6 33.6,6.6 33.8,6.8 33.8,8.901 U5.4
  Bottom Layer w0.35: v2(15.3,33.3) 15.3,39.675 15.8,40.175 18.395,40.175 20.577,37.993 26.207,37.993 28.325,35.875 28.325,25.475 28.675,25.125 29.4,25.125 29.75,24.775 29.75,17.943 29.955,17.738 36.622,17.738 v2(37.14,17.22) 37.14,16.225 36.935,16.02 34.842,16.02 34.815,15.993 34.174,15.993 U5.6 32.306,15.706 31.7,15.1 31.7,9.55 32.262,8.988 U5.4
GND: C1.1 C5.1 C7.1 C8.1 C9.1 C10.1 C11.1 C12.1 C13.1 C14.1 C15.1 C16.1 C17.1 C18.1 C19.1 C20.1 C21.1 C22.1 DS1.2 DS2.2 J1.5 J2.5 J3.2 J5.2 J6.1 pad.@19.4,14.5 Q1.2 R6.2 R11.1 R15.1 R19.1 R20.2 U2.8 U2.23 U2.35 U2.47 U2.49 U3.1 U4.1 X1.2 X1.4 | length 44.8
  Top Layer w0.2: U2.47 14.62,23.54 v1(13.47,24.69) v1(12.37,25.79) 13.12,26.54 U2.8 16.39,26.54 16.521,26.671 C9.1@17.024,26.671
  Top Layer w0.25: C11.1 7.72,23.102 7.995,23.377 7.995,23.394 8.141,23.54 U2.35 U2.49@10.12,23.54 ; U2.23 C10.1@10.12,30.542 ; U2.47 14.62,21.079 C12.1
  Top Layer w0.3: v2(2.227,24.373) 2.633,24.373 3.056,23.95 3.435,23.95 3.96,23.425 4.925,23.425 J1.5 ; C13.1 12.819,33.039 12.819,34.458 v2(12.862,34.501)
  Top Layer w0.35: v2(6.795,22.352) 6.843,22.4 6.843,22.595 7.125,22.877 7.395,22.877 C11.1
  Top Layer w0.5: J2.5 4.937,15.764 v2(4.953,15.748) 5.702,14.999 5.702,14.352 C14.1 ; v2(10.16,31.877) 10.16,30.722 C10.1 ; v2(10.858,16.8) R6.2 ; v2(14.732,19.685) 14.744,19.697 C12.1 ; C9.1 17.422,26.959 17.688,26.959 v2(18.415,27.686) ; C8.1 19.951,24.118 C7.1 20.193,24.13 v3(21.717,24.13) ; v3(22.225,1.143) 23.819,1.143 24.069,1.393 R20.2 ; R20.2@24.064,1.397 Q1.2 ; C1.1 25.188,32.893 25.508,32.573 25.508,32.404 v2(25.527,32.385)
  Top Layer w0.75: v3(28.194,5.969) 28.194,2.98 28.319,2.855 R19.1
  Bottom Layer w0.2: v2(17.6,12.6) 19,12.6 19.4,13 pad.@19.4,14.5
  other v1: 11.003,3.842 13.003,3.842 15.003,3.842 23.003,3.842 25.003,3.842 27.003,3.842 35.003,3.842 39.003,3.842 24.003,5.842 34.003,5.842 38.003,5.842 25.003,7.842 39.003,7.842 6.003,9.842 10.003,9.842 18.003,9.842 20.003,9.842 30.003,9.842 38.003,9.842 9.003,11.842 19.003,11.842 21.003,11.842 23.003,11.842 33.003,11.842 37.003,11.842 39.003,11.842 8.003,13.842 10.003,13.842 14.003,13.842 34.003,13.842 38.003,13.842 19.003,15.842 21.003,15.842 23.003,15.842 25.003,15.842 39.003,15.842 38.003,17.842 35.003,19.842 37.003,19.842 39.003,19.842 26.003,21.842 28.003,21.842 32.003,21.842 38.003,21.842 10.17,23.59 11.27,23.59 12.37,23.59 13.47,23.59 14.57,23.59 10.17,24.69 11.27,24.69 12.37,24.69 14.57,24.69 10.17,25.79 11.27,25.79 13.47,25.79 14.57,25.79 10.17,26.89 11.27,26.89 12.37,26.89 13.47,26.89 14.57,26.89 10.17,27.99 11.27,27.99 12.37,27.99 13.47,27.99 14.57,27.99 9.003,35.842 13.003,35.842 27.003,35.842 28.003,37.842 13.003,39.842 23.003,39.842 25.003,39.842 27.003,39.842 29.003,39.842 4.003,41.842 24.003,41.842 26.003,41.842 28.003,41.842 30.003,41.842 13.003,43.842 23.003,43.842 25.003,43.842 27.003,43.842 29.003,43.842 12.003,45.842 15.003,47.842 33.003,47.842
  other v2: 0.65,7.15 1.55,7.15 0.65,8.15 1.55,8.15 0.65,9.15 1.55,9.15 2.425,9.175 3.35,9.2 0.65,10.15 1.55,10.15 2.425,10.15 31.48,24.94 30.51,25.08 21.971,26.035 31.48,26.34 30.51,26.48 21.971,27.178 31.48,27.84 30.51,27.98 31.48,29.34 30.51,29.48 31.48,30.84 30.51,30.98 25.527,33.401 39.3,34.9 39.3,36.42 39.3,37.8 39.3,39.3 37.338,39.751 39.3,40.8 37.338,40.894 36.449,42.037 37.338,42.037 8.89,44.323 8.89,45.212 8.89,46.101 8.89,46.99
  other v3: 29.591,6.096
"IMU INT": J7.3 pad.@1.7,31 U2.45 | length 49.2
  Top Layer w0.2: 13.62,21.488 U2.45
  Top Layer w0.35: J7.3 v2(2.794,41.402) ; v2(8.477,15.773) 14.273,15.773 14.478,15.978 14.478,16.002 14.605,16.129 14.605,17.653 14.224,18.034 13.85,18.034 13.645,18.239 13.645,21.488
  Bottom Layer w0.2: 2.35,29.05 2.4,29.1
  Bottom Layer w0.25: 0.889,30.988 1.688,30.988 pad.@1.7,31
  Bottom Layer w0.35: v2(2.794,41.402) 2.746,41.354 2.569,41.354 2.568,41.353 1.221,41.353 0.889,41.021 0.889,30.988 0.889,29.861 1.7,29.05 2.35,29.05 3,29.05 3.3,28.75 3.3,20 4.187,19.113 7.037,19.113 7.575,18.575 7.575,15.985 7.787,15.773 v2(8.477,15.773)
"IMU SCL": J7.1 pad.@3.4,31 R1.2 U2.42 | length 29.1
  Top Layer w0.25: 11.7,21.55 11.7,21.559 12.12,21.979 U2.42
  Top Layer w0.35: v2(4.375,32) 4.711,32.336 R1.2 ; v2(8.55,18.025) 9.775,18.025 11.7,19.95 11.7,21.55
  Top Layer w0.5: J7.1 3.175,34.036 R1.2
  Bottom Layer w0.25: pad.@3.4,31 4.375,31
  Bottom Layer w0.35: v2(4.375,32) 4.375,31 4.375,20.425 5.1,19.7 7.9,19.7 8.55,19.05 v2(8.55,18.025)
"IMU SDA": "pad.T GND16" J7.2 R2.2 U2.43 | length 39.4
  Top Layer w0.25: 12.46,21.54 12.62,21.701 U2.43
  Top Layer w0.35: J7.2 2.989,36.762 3.751,36.762 4.064,36.449 4.064,35.768 4.522,35.31 7.858,35.31 R2.2 8.013,35.179 9.271,35.179 9.653,34.797 v2(9.653,33.77) ; v2(9.65,17.15) 10.2,17.15 10.75,17.7 11.55,17.7 12.45,18.6 12.45,21.531 12.46,21.54
  Bottom Layer w0.35: v2(9.65,17.15) 9.65,19.175 8.475,20.35 6.025,20.35 5.5,20.875 5.5,31 5.5,31.25 6.635,32.385 9.144,32.385 9.653,32.894 v2(9.653,33.77)
"IND OUT 5V": L2.2 U4.2 | length 4.3
  Top Layer w0.15: 33.747,33.875 34.551,33.875 34.8,33.626 U4.2
  Top Layer w0.35: L2.2 31.247,33.875 33.747,33.875
"LED1 K": DS1.1 R9.2 | length 4.2
  Top Layer w0.3: R9.2 3.363,47.432 3.695,47.764 DS1.1
"LED2 K": DS2.1 R7.2 | length 3
  Top Layer w0.3: DS2.1@4.965,47.879 4.965,45.139 R7.2
"LED IND1": R7.1 U2.17 | length 20.1
  Top Layer w0.25: v2(12.187,31.987) 12.226,31.948 12.602,31.948 13.12,31.43 U2.17
  Top Layer w0.35: R7.1 7.112,44.892 v2(7.112,43.18)
  Bottom Layer w0.35: v2(7.112,43.18) 7.112,40.386 7.62,39.878 7.62,37.035 7.825,36.83 10.541,36.83 11.938,35.433 11.938,32.304 12.187,32.055 v2(12.187,31.987)
"MCU BOOT0": R6.1 U2.44 | length 5.6
  Top Layer w0.2: 13.095,21.4 13.12,21.425 U2.44
  Top Layer w0.25: R6.1@13.12,16.86 13.15,16.83 R6.1@13.15,16.8
  Top Layer w0.35: 13.095,21.4 13.095,16.885 R6.1@13.12,16.86
"MCU NRST": C14.2 J2.3 R4.2 U2.7 | length 64.4
  Top Layer w0.2: U2.7 16.059,26.04 16.085,26.066 18.116,26.066
  Top Layer w0.35: C14.2@4.376,14.178 4.376,13.404 4.572,13.208 6.604,13.208 6.985,13.589 6.985,14.224 7.366,14.605 15.868,14.605 16.404,15.141 16.404,18.695 16.609,18.9 21.85,18.9 22.35,19.4 22.35,23.4 22.84,23.89 25.94,23.89 26.35,24.3 26.35,34 25.95,34.4 19.7,34.4 19.2,33.9 19.2,27.15 18.116,26.066
  Top Layer w0.5: R4.2 C14.2 4.254,14.3 4.254,15.05 3.667,15.637 J2.3
"MCU OSC IN": C5.2 U2.5 X1.1 | length 12.2
  Top Layer w0.2: U2.5 19.452,25.04 19.685,25.273 20.295,25.273
  Top Layer w0.35: 20.295,25.273 24.33,25.273 24.753,25.696 C5.2
  Top Layer w0.5: X1.1 24.753,28.387 C5.2
"MCU OSC OUT": R5.2 U2.6 | length 8.2
  Top Layer w0.2: U2.6 16.059,25.54 16.134,25.615 17.211,25.615 17.235,25.591 18.86,25.591 19.431,26.162
  Top Layer w0.3: 19.431,26.162 19.912,26.162
  Top Layer w0.35: 19.912,26.162 20.193,26.443 20.193,29.095 20.376,29.278 20.376,29.378 20.601,29.603 R5.2
"MCU SWCLK": J2.4 U2.37 | length 9.9
  Top Layer w0.25: U2.37 9.62,22.115 9.62,21.979 10.033,21.566 10.033,21.463
  Top Layer w0.35: J2.4 3.667,18.743 4.863,19.939 9.17,19.939 10.033,20.802 10.033,21.463
"MCU SWDIO": J2.2 U2.34 | length 11.2
  Top Layer w0.2: 7.95,24.05 8.65,24.05 8.96,24.05 U2.34
  Top Layer w0.35: J2.2 2.397,18.877 4.009,20.489 5.259,20.489 6.065,21.295 6.065,23.715 6.4,24.05 7.95,24.05
"MCU SWO": J2.6 U2.39 | length 9.4
  Top Layer w0.25: 10.62,21.6 U2.39
  Top Layer w0.35: J2.6 4.937,18.837 5.4,19.3 9.6,19.3 10.62,20.32 10.62,21.6
"MCU VCAP1": C13.2 U2.22 | length 4.1
  Top Layer w0.2: U2.22 10.63,29.2 10.63,29.576 11.276,30.222 11.276,30.526
  Top Layer w0.35: 11.276,30.526 C13.2
"PUSH BTN IN": C16.2 R10.2 U2.15 | length 29.6
  Top Layer w0.25: v2(13.78,32.242) 13.78,29.989 14.12,29.649 U2.15
  Top Layer w0.5: R10.2 10.86,46.67 11.11,46.92 11.11,48.768 13.118,48.768 v2(13.125,48.775)
  Bottom Layer w0.3: v2(13.125,48.775) 16.225,48.775 17,48 17,43.5 15.65,42.15 14.25,42.15 13.78,41.68 v2(13.78,32.242)
"SIM RX": J4.1 pad.@10.61,5.57 U2.31 | length 38
  Top Layer w0.25: v2(7.5,25.9) 7.5,25.861 7.821,25.54 U2.31
  Top Layer w0.35: J4.1 v2(9.2,4.8)
  Bottom Layer w0.35: v2@7.5,25.861 7.5,23.16 8.374,22.286 9.224,22.286 10.41,21.1 13.712,21.1 13.917,20.895 13.917,18.805 14.122,18.6 14.9,18.6 15.3,18.2 15.3,11.7 15.9,11.1 15.9,7.15 15.35,6.6 13.05,6.6 12.02,5.57 10.61,5.57 9.868,4.828 9.228,4.828 v2(9.2,4.8)
"SIM TX": J4.2 pad.@10.583,7.604 U2.30 | length 63.6
  Top Layer w0.25: v2(6.7,28.2) 6.7,27.6 8.26,26.04 U2.30
  Top Layer w0.35: J4.2 3.03,3.52 3.55,3 v2(8.25,3)
  Bottom Layer w0.2: v2(8.25,3) 8.25,7 8.85,7.6 pad.@10.583,7.604
  Bottom Layer w0.35: v2(6.7,28.2) 6.7,29.709 6.905,29.914 16.136,29.914 16.35,29.7 16.35,12.5 17.15,11.7 17.15,3.9 16.248,2.998 8.252,2.998 v2(8.25,3)
USB_D_N: J1.2 U2.32 | length 4.1
  Top Layer w0.181: J1.2 5.133,25.167 6.505,25.167 6.635,25.037 7.379,25.037 7.434,24.982 8.619,24.982 8.676,25.04 U2.32
USB_D_P: J1.3 U2.33 | length 4.1
  Top Layer w0.181: J1.3 5.133,24.783 6.345,24.783 6.475,24.653 7.22,24.653 7.275,24.598 8.619,24.598 8.676,24.54 U2.33
"V BAT": C19.2 J3.1 L2.1 U4.5 U4.6 U4.7
"XTL IN": C1.2 R5.1 X1.3 | length 4.1
  Top Layer w0.5: R5.1 22.437,31.103 X1.3 22.618,30.922 C1.2
XTRA1: pad.X1 U2.25 | length 2.1
  Top Layer w0.2: v2(8.359,29.142) 8.383,29.118 8.383,28.718 8.551,28.55 8.96,28.55 U2.25
  Bottom Layer w0.35: v2(8.359,29.142) 8.359,28.093 pad.X1
XTRA2: pad.X2 U2.19 | length 3.8
  Top Layer w0.25: 12.118,29.903 12.12,29.901 U2.19
  Top Layer w0.35: 12.118,29.903 v2(12.118,30.918)
  Bottom Layer w0.35: v2(12.118,30.918) pad.X2 pad.X2@13.219,30.918
pads on no net: J1.1 J1.4 J1.6 J1.7 J1.8 J1.9 J1.10 J1.11 J2. J2.MH SW1.MH1 SW1.MH2 SW1.MH3 U2.2 U2.3 U2.4 U2.10 U2.11 U2.12 U2.16 U2.18 U2.20 U2.21 U2.26 U2.27 U2.29 U2.38 U2.40 U2.41 U2.46

## Polygon pours and split planes (outlines as drawn)
GND on Top Layer "GND_L01_P100" (solid, pour order 100): 21.844,29.083 22.098,29.337 23.241,29.337 23.368,29.21 23.368,27.178 23.495,27.051 23.495,26.162 22.987,25.654 21.717,25.654 21.59,25.781 21.59,26.924 21.336,27.178 21.336,28.067 21.844,28.575
GND on Top Layer "GND_L01_P096" (solid, pour order 96): 26.035,30.607 25.781,30.353 24.638,30.353 24.209,30.782 24.209,30.813 25.019,31.75 25.019,33.655 25.146,33.782 25.908,33.782 26.035,33.655
GND on Top Layer "GND_L01_P095" (solid, pour order 95): 5.08,50.038 9.652,50.038 9.652,39.878 9.525,39.751 8.636,39.751 8.128,40.259 8.128,46.101 7.239,46.99 6.477,46.99 6.265,47.202 6.265,48.279 6.165,48.379 5.469,48.379 5.08,48.768
GND on Top Layer "GND_L01_P092" (solid, pour order 92): 27.559,6.604 27.686,6.731 30.226,6.731 30.353,6.604 30.353,5.588 30.226,5.461 27.686,5.461 27.559,5.588
+3V3 on Top Layer "+3V3_L01_P087" (solid, pour order 87): 29.21,44.831 29.845,44.196 29.845,43.18 31.242,41.783 31.242,41.021 31.623,40.64 32.004,41.021 32.004,42.24 33.02,43.053 33.02,45.085 33.528,45.593 35.052,45.593 35.433,45.974 35.433,46.355 35.052,46.736 33.147,46.736 32.512,47.371 32.512,50.038 18.415,50.038 18.415,46.355 19.939,44.831
GND on Top Layer "GND_L01_P086" (solid, pour order 86): 34.544,44.45 34.671,44.577 38.608,44.577 38.862,44.323 38.862,40.894 34.671,40.894 34.544,41.021 34.544,41.656
+5V on Top Layer "+5V_L01_P085" (solid, pour order 85): 34.156,49.988 34.184,49.96 34.184,47.807 34.59,47.401 35.967,47.401 36.216,47.152 36.216,45.119 36.558,44.777 40.014,44.777 40.014,49.942 40.06,49.988
"V BAT" on Top Layer "V_BAT_L01_P080" (solid, pour order 80): 28.86,38.608 29.622,39.37 35.179,39.37 35.96,38.608 35.96,35.36 35.8,35.2 35.4,35.2 35.08,34.88 35.08,34.34 35.02,34.28 33.52,34.28 33.14,34.66 33.14,35.06 32.94,35.26 29.2,35.26 28.86,35.6
GND on Top Layer "GND_L01_P084" (solid, pour order 84): 0,6.25 3.25,6.25 4,7 4,10 3.25,10.75 0,10.75
GND on Top Layer "GND_L01_P082" (solid, pour order 82): 34.1,31.6 34.4,31.9 34.4,32.937 34.075,33.262 34,33.188 34,32.04 33.66,31.7 29.4,31.7 29.02,31.32 29.02,24.52 29.04,24.5 29.5,24.04 33.72,24.04 34.16,24.48
GND on Top Layer "GND_L01_P077" (solid, pour order 77): 36.36,36.827 36.36,41.37 36.51,41.52 40.01,41.52 40.01,33.54 38.17,33.54 38.17,34.84 37.66,35.35 36.63,35.35 36.39,35.45 36.39,35.59
+5V on Top Layer "+5V_L01_P081" (solid, pour order 81): 35.08,31.88 35.183,31.983 35.183,33.478 35.204,33.5 35.496,33.5 35.7,33.296 35.7,32.2 36,31.9 36.945,31.9 37.565,31.28 40,31.28 40,23.3 39.5,22.8 35.62,22.8 35.08,23.34
+5V on Bottom Layer "+5V_L04_P089" (solid, pour order 89): 34.156,49.988 34.168,50 40,50 40,44.791 40.014,44.777 34.725,44.777 34.156,45.346
+5V on Bottom Layer "+5V_L04_P088" (solid, pour order 88): 35.814,30.607 36.322,31.115 40.005,31.115 40.005,24.765 36.322,24.765 35.814,25.273
GND on Int1 (GND) "GND_L02_P002" (solid, pour order 2): 0,50 40,50 40,0 0,0
GND on Int2 (GND) "GND_L03_P003" (solid, pour order 3): 0,50 40,50 40,0 0,0

## Silkscreen, mask and mechanical layers (free items; w line width, h text height)
Top Overlay:
  text "HyperTronics" at 26.924,32.789 h0.8 r270
  text "USB" at 3.379,29.754 h1
  text "SWD" at 7.421,19.343 h1
Bottom Overlay:
  lines w0.1: 2.5,28.3 2.5,31.95 ; 4.375,28.3 4.375,32
  lines w0.254: 0.4,30 6.574,30 ; 2.5,31.95 cw(c2.525,31.95) 2.525,31.975 ; 6.469,28.3 0.4,28.3 0.4,30.2 0.4,32 6.57,32 6.57,28.3 ; 7.4,27.953 ccw(c8.359,28.093) 9.316,28.248 ; 9.7,6.5 cw(c9.8,6.5) 9.8,6.6 13.2,6.6 ; 11.45,4.5 11.45,8.5 ; 13.005,30.176 ccw(c13.696,30.926) 14.303,31.745 ; 18.5,15.5 24.5,15.5 ; 20.5,13.5 20.5,17.5 ; 22.4,13.5 22.4,17.4 cw(c22.5,17.4) 22.5,17.5 ; 31.5,5.45 cw(c31.55,5.45) 31.55,5.5 35.5,5.5 ; 32.775,31.65 32.775,33.45 34.375,33.45 ; 33.5,3.5 ccw(c33.5,3.55) 33.55,3.55 33.55,7.45 ; 33.5,7.45 cw(c33.55,7.45) 33.55,7.5 ; 36,25.9 37,25.9 37,26.9 ; 9.7,4.5 13.2,4.5 13.2,8.5 9.7,8.5 9.7,4.5 ; 18.5,13.5 18.5,17.5 24.5,17.5 24.5,13.5 18.5,13.5 ; 31.5,3.5 35.5,3.5 35.5,7.5 31.6,7.5 ccw(c31.6,7.4) 31.5,7.4 31.5,3.5
  text "BAT" at 31.871,40.404 h1
  text "GND" at 37.675,36.475 h0.5 r90
  text "IMU" at 6.56,32.815 h0.5
  text "EDP" at 35.199,32.55 h1.6 r90
  text "May 2025" at 36.75,32.4 h0.6 r90
  text "T3" at 8.963,31.498 h1
  text "X2" at 12.392,29.492 h0.5
  text "SCL" at 3.957,29.046 h0.4
  text "SDA" at 6.05,29.025 h0.4
  text "INT" at 1.962,28.931 h0.4
  text "X1" at 10.048,28.804 h0.5
  text "25" at 35.2,27.7 h0.75 r90
  text "PWR" at 22.582,18.296 h0.5
  text "T1" at 24.746,18.254 h1
  text "GND" at 20,16.3 h0.4
  text "5V" at 21.8,16.3 h0.4
  text "3V3" at 24,16.3 h0.4
  text "GPS/GPRS" at 8.373,13.043 h1
  text "5V | GND" at 5.95,11.95 h0.5
  text "RX | TX" at 5.95,10.95 h0.5
  text "GasSensor" at 30.95,9.25 h0.5 r90
  text "T2" at 15.647,7.767 h1
  text "T4" at 38.156,7.454 h1
  text "TX" at 12.6,7.4 h0.4
  text "IN" at 34.7,6.7 h0.4 r90
  text "GPS/GPRS" at 17.85,6.421 h0.5
  text "RX" at 12.6,5.3 h0.4
  text "ACT" at 34.7,5 h0.4 r90